# Altium PCB DataPCB.PcbDoc
Units mil, origin at the board's own origin, x right, y up, seen from the top; angles counter-clockwise.
Board outline 1500 x 1687.5 mil, 2 copper layers (Top Layer, Bottom Layer); 60 components, 81 nets, 333 pads, 139 vias.
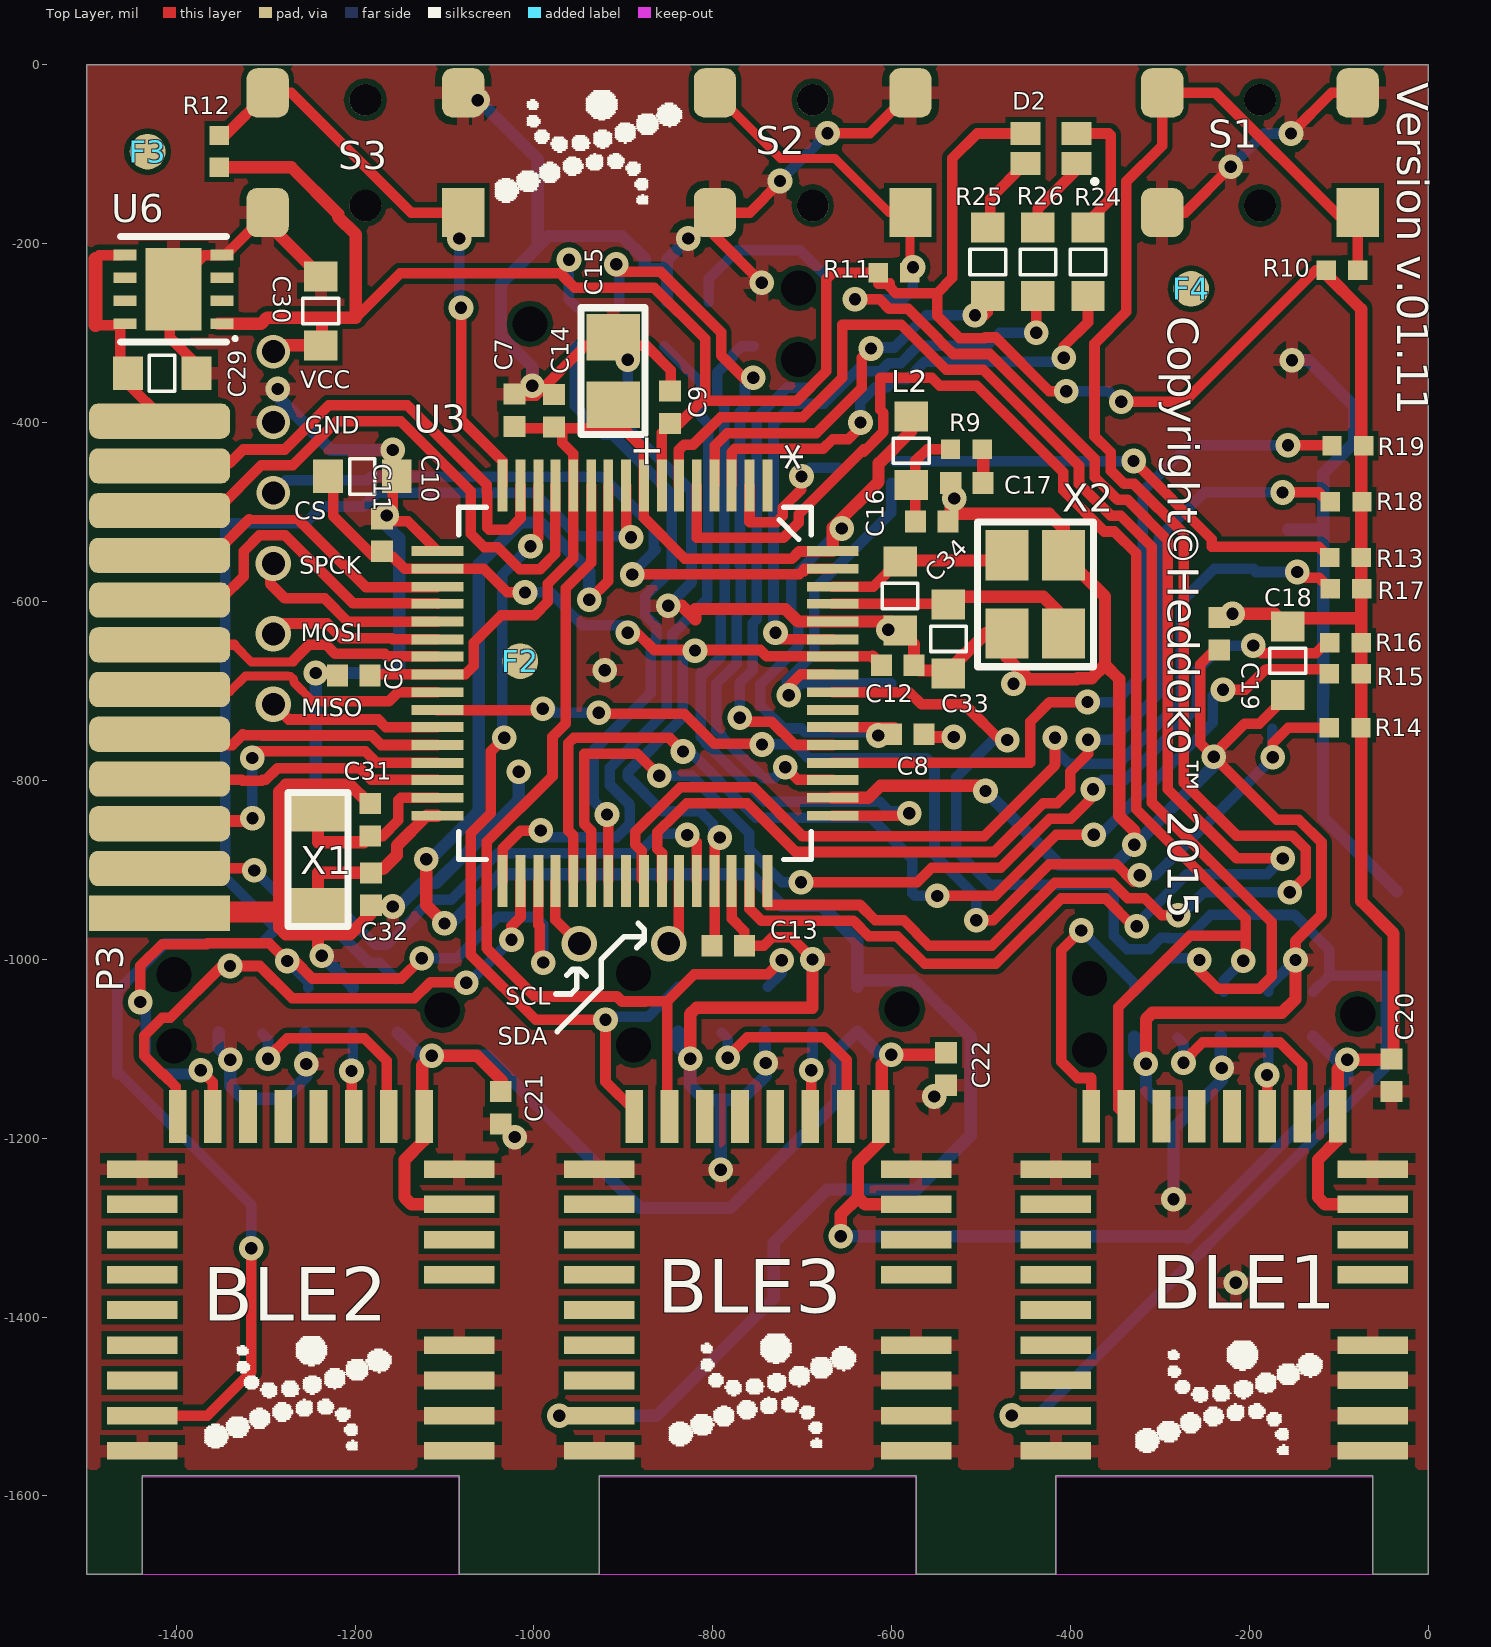
[diagram p0: Top Layer view]
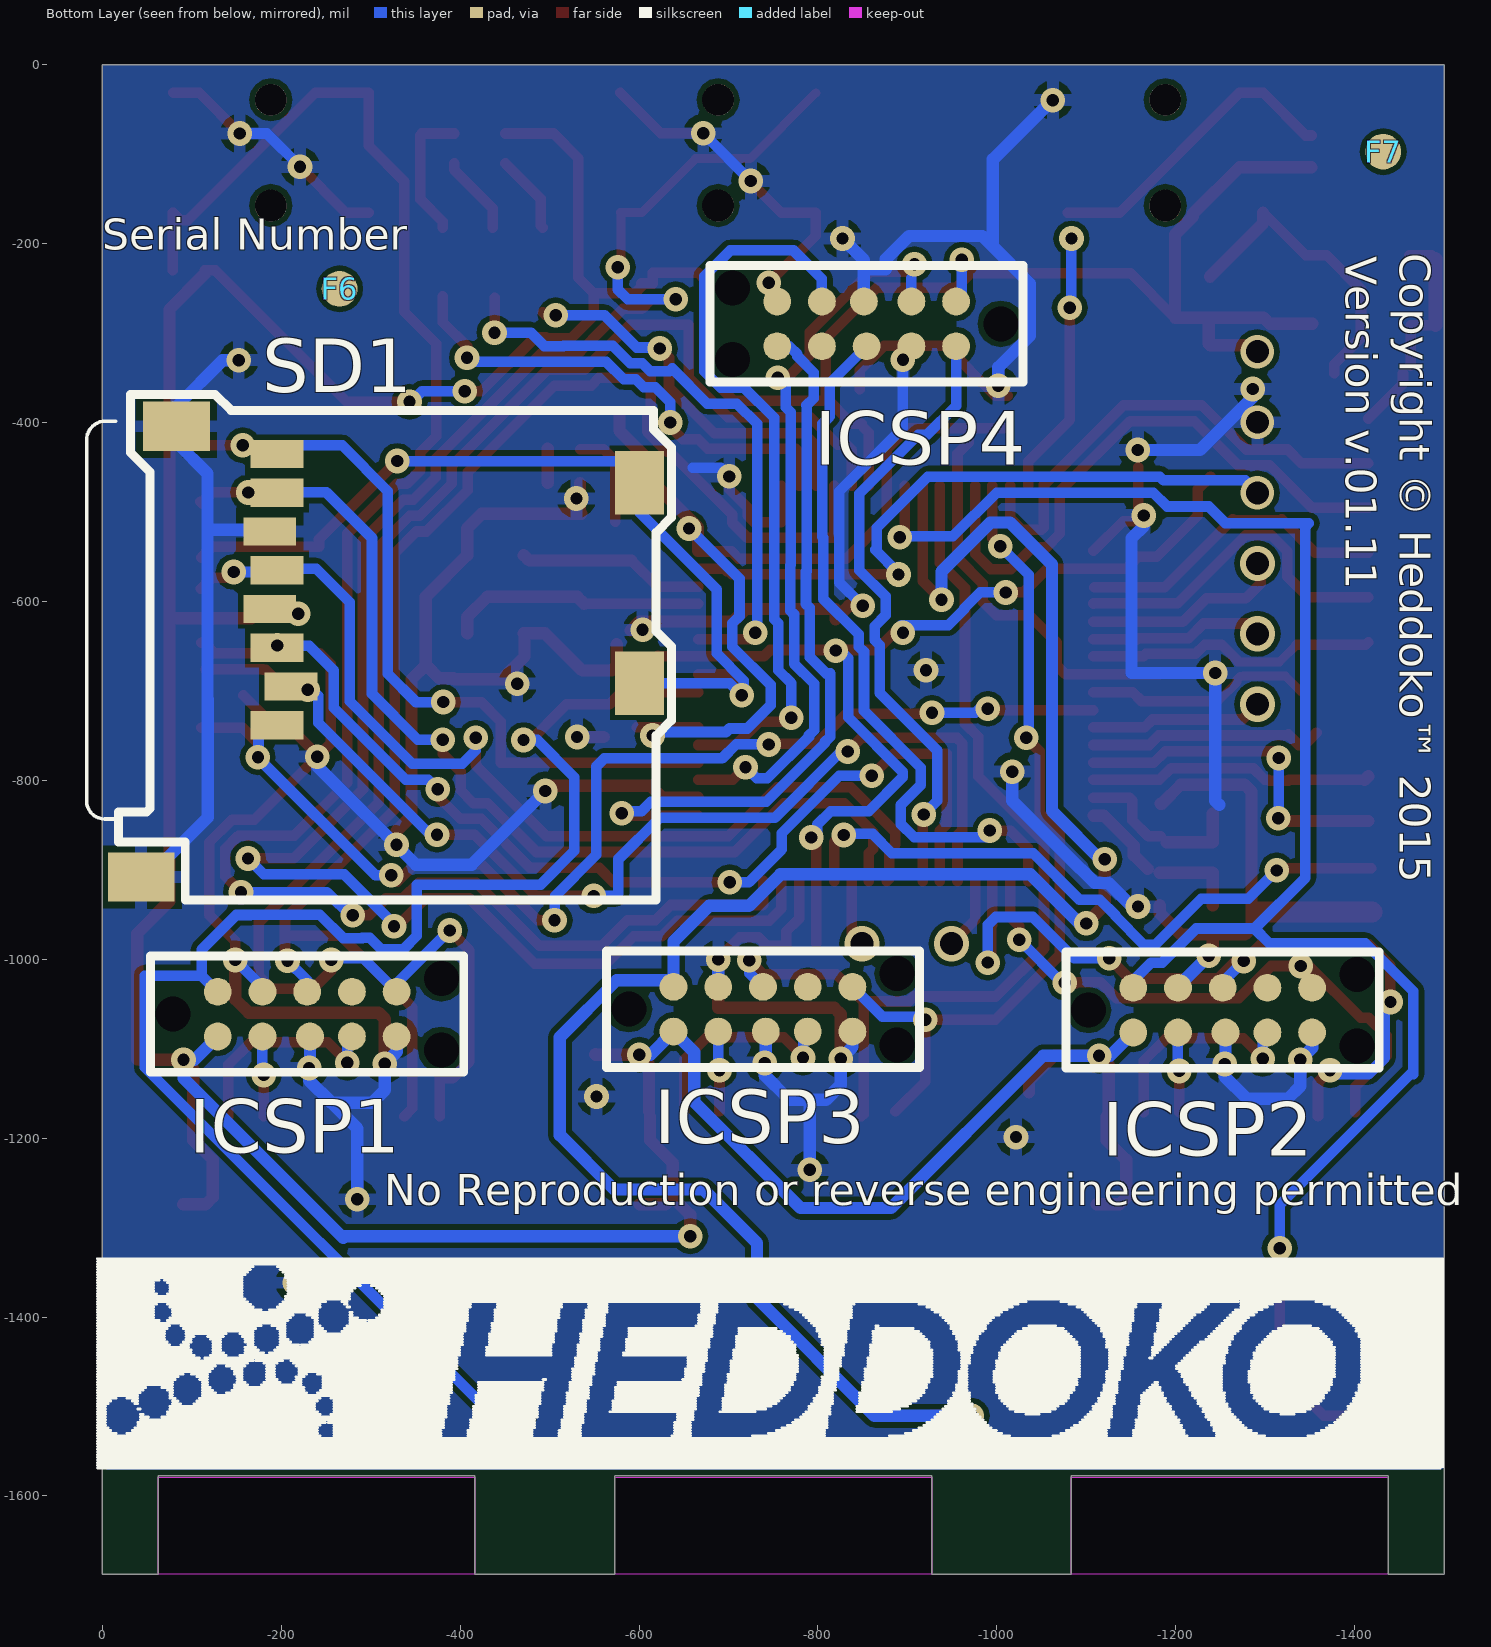
[diagram p1: Bottom Layer view, seen from below]

## Layer stack, top to bottom
Top Solder: solder mask 0.4, Solder Resist, Dk 3.5
Top Layer: signal copper 1.4
Dielectric 1: dielectric 12.6, FR-4, Dk 4.8
Bottom Layer: signal copper 1.4
Bottom Solder: solder mask 0.4, Solder Resist, Dk 3.5

## Board outline
-1437.75,-1687.5 -1437.75,-1577.5 -1083.42,-1577.5 -1083.42,-1687.5 -927.17,-1687.5 -927.17,-1577.5 -572.84,-1577.5 -572.84,-1687.5 -416.58,-1687.5 -416.58,-1577.5 -62.25,-1577.5 -62.25,-1687.5 0,-1687.5 0,0 -1500,0 -1500,-1687.5

## Design rules (kind name [scope] priority, off if disabled: settings)
Clearance [All] p1: gap=5.91
PlaneConnect [All] p1: planeconnectstyle=Relief reliefexpansion=20 reliefentries=4 reliefconductorwidth=13.78 reliefairgap=7.87
PolygonConnect [All] p1: connectstyle=Relief reliefconductorwidth=13.78 reliefentries=4 polygonreliefangle="90 Angle" airgapwidth=7.87
RoutingVias [All] p1: holewidth=15.75 width=31.5 viastyle="Through Hole" minholewidth=11.81 minwidth=23.62 maxholewidth=248.03 maxwidth=393.7
SolderMaskExpansion [All] p1: expansion=4
Width [All] p1: maxlimit=78.74 minlimit=5.91 preferedwidth=13.78
29 further rules are at their usual default settings.

## Components (designator, comment, footprint, x,y, rotation, side; value= is the part's Value field where it differs from the comment)
BLE1 "QS9322" QS9322 -62.2,-1175.64 r180 top locked
BLE2 "QS9322" QS9322 -1083.42,-1175.69 r180 top locked
BLE3 "QS9322" QS9322 -572.84,-1175.69 r180 top locked
C6 "" "CAP 0402" -1201.39,-682.79 r180 top
C7 "" "CAP 0402" -1021.69,-386.4 r90 top
C8 "" "CAP 0402" -582,-748.5 r0 top
C9 "" "CAP 0402" -847.71,-383.08 r90 top
C10 "" 0603 -1191.11,-460.18 r0 top
C11 "" "CAP 0402" -1169.75,-525.8 r90 top
C12 "" "CAP 0402" -593.29,-671.42 r0 top
C13 "" "CAP 0402" -782.81,-984.9 r0 top
C14 "" "CAP 0402" -977.6,-386.93 r90 top
C15 "" 0805 -911.3,-342.66 r90 top
C16 "" "CAP 0402" -555.41,-510.69 r0 top
C17 "" "CAP 0402" -515.94,-467.67 r0 top
C18 "" 0603 -157.21,-667.05 r270 top
C19 "" "CAP 0402" -233.91,-636.25 r270 top
C20 "" "CAP 0402" -41.42,-1129.82 r270 top
C21 "" "CAP 0402" -1037.09,-1166.04 r270 top
C22 "" "CAP 0402" -539.23,-1122.74 r270 top
C29 "" 0603 -1414.98,-344.8 r0 top
C30 "" 0603 -1238.43,-274.67 r90 top
C31 "" "CAP 0402" -1182.93,-844.22 r90 top
C32 "" "CAP 0402" -1182.3,-921.54 r270 top
C33 "4pF" 0603 -536.5,-642.7 r270 top
C34 "4pF" 0603 -590.59,-594.67 r270 top
D2 "LED2_RGB" "LED RGB" -422.05,-93.7 r180 top locked
F2 "" FIDUCIAL_1MM -1015.27,-666.87 r0 top
F3 "" FIDUCIAL_1MM -1431.92,-97.27 r0 top
F4 "" FIDUCIAL_1MM -265.29,-250.56 r0 top
F6 "" FIDUCIAL_1MM -265.29,-250.56 r180 bottom
F7 "" FIDUCIAL_1MM -1431.92,-97.27 r180 bottom
ICSP1 "TC2050" TC2050-IDC-NL -79.03,-1061.4 r180 bottom
ICSP2 "TC2050" TC2050-IDC-NL -1102.48,-1056.93 r180 bottom
ICSP3 "TC2050" TC2050-IDC-NL -588.58,-1055.9 r180 bottom
ICSP4 "TC2050" TC2050-IDC-NL -1004.47,-289.74 r0 bottom
L2 "" 0603 -578.26,-430.89 r90 top
P3 "Ribon Cable pads 12 pads" "Ribbon 12 1.27mm" -1418.39,-948.55 r180 top
R9 "" "RES 0402" -516.61,-429.93 r180 top
R10 "" "RES 0402" -96.67,-229.79 r180 top
R11 "" "RES 0402" -597.5,-232.72 r180 top
R12 "" "RES 0402" -1351.79,-96.88 r270 top
R13 "" "RES 0402" -92.75,-551 r0 top
R14 "" "RES 0402" -93.07,-741.26 r0 top
R15 "" "RES 0402" -93,-680.82 r0 top
R16 "" "RES 0402" -92.75,-646.32 r0 top
R17 "" "RES 0402" -92.26,-586.04 r0 top
R18 "" "RES 0402" -92.01,-488.76 r0 top
R19 "" "RES 0402" -90.05,-426.03 r0 top
R24 "" 0603 -380.72,-219.78 r90 top
R25 "" 0603 -492.65,-219.78 r90 top
R26 "" 0603 -436.69,-219.78 r90 top
S1 "Power" "Tac Sw RA SMT" -187.4,-98.43 r90 top locked
S2 "Action 1" "Tac Sw RA SMT" -687.4,-98.43 r90 top locked
S3 "Action 2" "Tac Sw RA SMT" -1187.4,-98.43 r90 top locked
SD1 "MICRO SD" MICRO_SD_WE -187.23,-608.54 r90 bottom (schematic designator SD1x)
U3 "Flash MCU" QFP50P1200X1200X160-64N -887,-691.56 r270 top locked
U6 "" "DFN8 U-DFN3030-8" -1402.86,-251.19 r90 top
X1 "Xtal 32" "Xtal smd 32khz - larger" -1241.47,-888.67 r270 top
X2 "Xtal 16" "Xtal smd 3.2X2.5" -439.3,-592.43 r90 top

## Footprints (in the part's own frame and the unit in brackets; to place one, negate y for a bottom-side part, rotate by r counter-clockwise, add the part's x,y. Pads: shape width x height; smd on the part's side, far side on the other; paste and mask are expansions set on the pad)
0603 [mm] "SMT  0603"
  rect 0.85x0.95 smd: 1(-0.992,-0.003) 2(0.958,-0.003)
  silkscreen extent -0.38,-0.51 0.34,0.5, body extent -0.89,-0.43 0.86,0.42, height 1
0805 [mil]
  rect 52x60 smd: 1(-37.4,0) 2(38,0)
  silkscreen extent -71,-35 71,36
"CAP 0402" [mm] "Chip Capacitor, 2-Leads, Body 1.00x0.50mm, IPC Medium Density"
  rect 0.6x0.62 smd: 1(-0.46,0) 2(0.46,0)
  body extent -0.53,-0.28 0.53,0.27, height 0.4
"DFN8 U-DFN3030-8" [mm]
  rect 2.35x1.6 smd: 0(0,0)
  rect 0.3x0.65 smd: 1(-0.975,-1.375) 2(-0.325,-1.375) 3(0.325,-1.375) 4(0.975,-1.375) 5(0.975,1.375) 6(0.325,1.375) 7(-0.325,1.375) 8(-0.975,1.375)
  silkscreen extent -1.5,-1.8 1.5,1.5
FIDUCIAL_1MM [mil]
  rrect100% 40x40 smd: 1(0,0)
"LED RGB" [mm] "160-2162-1-ND"
  rect 0.85x0.65 smd: 1(-0.725,0.425) 2(0.725,0.425) 3(-0.725,-0.425) 4(0.725,-0.425)
  silkscreen extent -1.25,0.93 -1.23,0.93, body extent -1.11,-0.75 1.16,0.75, height 1
MICRO_SD_WE [mm] "MICRO SD CARD PUSH-PUSH  from WE  693071010811"
  rect 1.4x1.9 smd: 0(-7.61,3.65) 0(5.19,2.65)
  rect 0.8x1.5 smd: 1(-3.3,-0.2) 2(-2.2,-0.6) 3(-1.1,-0.2) 4(0,0) 5(1.1,-0.2) 6(2.2,0) 7(3.3,-0.2) 8(4.4,-0.2)
  rect 1.8x1.4 smd: CD(-2.11,-10.5) CD(3.59,-10.5)
  silkscreen extent -8.26,-11.4 6.09,5.2, body extent -8.36,-10.87 5.64,4.33, height 1.83
QFP50P1200X1200X160-64N [mil]
  rect 58x11 smd: 1(-221,148) 2(-221,128) 3(-221,108) 4(-221,89) 5(-221,69) 6(-221,49) 7(-221,30) 8(-221,10) 9(-221,-10) 10(-221,-30) 11(-221,-49) 12(-221,-69) 13(-221,-89) 14(-221,-108) 15(-221,-128) 16(-221,-148) 33(221,-148) 34(221,-128) 35(221,-108) 36(221,-89) 37(221,-69) 38(221,-49) 39(221,-30) 40(221,-10) 41(221,10) 42(221,30) 43(221,49) 44(221,69) 45(221,89) 46(221,108) 47(221,128) 48(221,148)
  rect 11x58 smd: 17(-148,-221) 18(-128,-221) 19(-108,-221) 20(-89,-221) 21(-69,-221) 22(-49,-221) 23(-30,-221) 24(-10,-221) 25(10,-221) 26(30,-221) 27(49,-221) 28(69,-221) 29(89,-221) 30(108,-221) 31(128,-221) 32(148,-221) 49(148,221) 50(128,221) 51(108,221) 52(89,221) 53(69,221) 54(49,221) 55(30,221) 56(10,221) 57(-10,221) 58(-30,221) 59(-49,221) 60(-69,221) 61(-89,221) 62(-108,221) 63(-128,221) 64(-148,221)
  silkscreen extent -197,-197 197,197
QS9322 [mm] "QS9322 Bluetooth 4.0 Low Energy Module"
  rect 2x0.5 smd: 1(9,9.5) 2(9,8.5) 3(9,7.5) 4(9,6.5) 5(9,5.5) 6(9,4.5) 7(9,3.5) 8(9,2.5) 9(9,1.5) 18(0,1.5) 19(0,2.5) 20(0,3.5) 21(0,4.5) 22(0,6.5) 23(0,7.5) 24(0,8.5) 25(0,9.5)
  rect 0.5x1.5 smd: 10(8,0) 11(7,0) 12(6,0) 13(5,0) 14(4,0) 15(3,0) 16(2,0) 17(1,0)
  Keep-Out Layer region: 0,10.25 9,10.25 9,13 0,13
  body extent 0,0 9,10.25, height 1
"RES 0402" [mm] "Chip Resistor, 2-Leads, Body 1.00x0.50mm, IPC Medium Density"
  rect 0.55x0.55 smd: 1(-0.45,0) 2(0.45,0)
  body extent -0.53,-0.27 0.53,0.28, height 0.4
"Ribbon 12 1.27mm" [mm] "Pads for 1.27mm pitch ribbon cable"
  rect 4x1 smd: 1(0,0)
  rrect50% 4x1 smd: 2(0,-1.27) 3(0,-2.54) 4(0,-3.81) 5(0,-5.08) 6(0,-6.35) 7(0,-7.62) 8(0,-8.89) 9(0,-10.16) 10(0,-11.43) 11(0,-12.7) 12(0,-13.97)
"Tac Sw RA SMT" [mm] "TE 1571262-2   SWITCH TACTILE SPST-NO 0.05A 12V"
  round 0.9 hole 0.9 unplated paste+0 mask+0: 0(-1.5,0.025) 0(1.5,0.025)
  rect 1.4x1.2 smd: 1(-1.7,-2.75)
  rrect50% 1.4x1.2 smd: 2(-1.7,2.8) 3(1.7,2.8) 4(1.7,-2.75)
  body extent -2.81,-2.67 4.34,2.73, height 1.7
TC2050-IDC-NL [mm] "Tag-Connect 10-Pin with No Legs (PN# TC2050-IDC-NL)"
  round 0.9 hole 0.995 unplated: 0(0,0) 0(7.62,-1.016) 0(7.62,1.016)
  round 0.79 smd paste-0.39: 1(1.27,-0.635) 2(2.54,-0.635) 3(3.89,-0.635) 4(5.08,-0.635) 5(6.35,-0.635) 6(6.35,0.635) 7(5.08,0.635) 8(3.81,0.635) 9(2.54,0.635) 10(1.27,0.635)
  silkscreen extent -0.64,-1.65 8.25,1.65
"Xtal smd 3.2X2.5" [mil]
  rect 56x48 smd: 0(-43.31,32) 0(44,-31.5) 1(-43.31,-31.5) 2(44,32)
  silkscreen extent -81,-65 81,65
"Xtal smd 32khz - larger" [mm] "ST3215SB  3.2×1.5mm"
  rect 1x1.55 smd: 1(-1.3,0) 2(1.3,0)
  silkscreen extent -1.9,-0.85 1.9,0.85

## Part data
BLE1 BLE2 BLE3: "QS9322 Bluetooth 4.0 Low Energy Module"
C6 C7 C8 C9 C10 C11 C12 C13 C14 C16 C18 C19 C20 C21 C22 C29 C30: library part Cap
C15: library part A01-0492
C17: library part A01-0046
C31 C32: library part A01-0013
C33 C34: library part A01-0018
D2: "RGB Led"
F2 F3 F4 F6 F7: library part FIDUCIAL
ICSP1 ICSP2 ICSP3 ICSP4: "ICSP Header"
L2: library part Inductor, "Inductor"
P3: library part "Ribon Cable pads_12", "Pads to solder a ribbon cable to 12pins"
R9: library part A02-0284
R10 R11 R12 R13 R14 R15 R16 R17 R18 R19: library part Res3
R24 R25 R26: library part Res3, "Resistor"
S1 S2 S3: library part "SW PUSHBUTTON", "SWITCH TACT 2.36MM SILV J-LEAD"
SD1: library part "MICRO SD SMK"
U3: library part ATSAM3S4BA-AU
U6: library part "AP7361-33FGE-7 LDO 3.3V", "IC REG LDO 3.3V 1A 8DFN"
X2: library part "Xtal 12"

## Via types
v1: diameter 27.56, hole 13.78, Top Layer to Bottom Layer, 131 vias
v2: diameter 39.37, hole 25.59, Top Layer to Bottom Layer, 5 vias
v3: diameter 37.4, hole 25.59, Top Layer to Bottom Layer, 3 vias

## Nets (pads, with @x,y where several pads share a name; then routed paths per layer and width w, separated by ;. In a path a pad name is that pad's centre, name@x,y a point inside that pad or via, vN(x,y) a via of type N, cw(c..) or ccw(c..) an arc to the next point about the centre after c; other vN are vias at no path point)
"ACTION 1 SW": R11.1 S2.1 S2.3 U3.47 | length 2075.9
  Top Layer w10: S2.3 -724.13,-105.01 -663.23,-105.01 -602.88,-165.35 S2.1 ; R11.1 S2.1@-579.78,-166
  Top Layer w11.81: U3.47 -759,-943.77 -745.62,-957.15 -642.82,-957.15 -625.62,-974.35 -594.12,-974.35 -563.19,-1005.28 -483.61,-1005.28 -410.51,-932.18 -360.91,-932.18 -329.87,-963.21 v1(-326.04,-963.21) ; v1(-641.01,-262.35) -613.56,-262.35 -602.84,-273.07 -581.72,-273.07 -548.19,-306.6 -548.19,-306.97 -540.4,-314.76 -540.04,-314.76 -531.37,-323.42 -490.36,-323.42 -372.96,-440.82 -372.96,-461.06 -347.59,-486.43 -336.45,-486.43 -291.43,-531.45 -291.43,-810.03 -214.09,-887.37 v1(-162.89,-887.37)
  Bottom Layer w11.81: v1(-641.01,-262.35) -587.35,-262.35 -576.32,-251.32 v1(-576.32,-226.43) ; v1(-326.04,-963.21) -326.04,-960.72 -270.25,-904.93 -180.45,-904.93 v1(-162.89,-887.37)
"ACTION 2 SW": R12.1 S3.1 S3.3 U3.16 | length 641.4
  Top Layer w11.81: R12.1 -1345.31,-79.17 S3.3 -1271.21,-31.5 -1137.35,-165.35 S3.1 ; v1(-1081.45,-271.8) -1081.45,-397.16 -1035,-443.62 U3.16
  Bottom Layer w11.81: v1@-1083.4,-269.86 v1(-1083.4,-194.34)
BLE1_CLK: BLE1.8
BLE1_CS: BLE1.7
BLE1_MISO: BLE1.5
BLE1_MOSI: BLE1.6
BLE1_RX: BLE1.10 ICSP1.6 U3.6 | length 1840.6
  Top Layer w11.81: U3.6 -838,-430.79 -832.19,-424.98 -822.21,-424.98 -791.37,-394.14 -699.41,-394.14 -655.35,-350.09 -655.35,-290.74 -610.23,-290.74 -610.17,-290.79 -589.43,-290.79 -539.08,-341.14 -497.7,-341.14 -390.68,-448.16 -390.68,-468.4 -354.93,-504.15 -343.79,-504.15 -309.15,-538.79 -309.15,-824.84 -175.12,-958.87 -175.12,-1019.03 -189.28,-1033.19 -235.48,-1033.19 -256.05,-1012.62 v1(-256.05,-1000.82) ; v1(-388.26,-967.85) -410.43,-990.02 -410.43,-1114.41 -392.03,-1132.8 -377.17,-1132.8 BLE1.10
  Bottom Layer w11.81: v1(-388.26,-967.85) -388.18,-967.85 -329.03,-1027 ICSP1.6 -291.76,-999.13 -257.73,-999.13 v1(-256.05,-1000.82)
BLE1_SCL: BLE1.4
BLE1_SDA: BLE1.3
BLE1_TX: BLE1.11 ICSP1.8 U3.5 | length 1601.5
  Top Layer w11.81: U3.5 -818,-529.09 -721.27,-529.09 -703.98,-511.79 -703.98,-502.73 -631.32,-430.08 -631.32,-432.51 -609.41,-410.6 -609.41,-389.4 -613.04,-385.77 -613.04,-350.19 -555.08,-350.19 -546.42,-358.85 -505.04,-358.85 -408.39,-455.5 -408.39,-475.74 -362.27,-521.86 -351.13,-521.86 -326.86,-546.13 -326.86,-832.18 -204.24,-954.81 -204.24,-971.48 ; BLE1.11 -346.6,-1166.84 -346.6,-1053.66 -266.62,-973.68 -204.24,-973.68 -204.24,-988.14
  Bottom Layer w11.81: ICSP1.8 -229.03,-1023.7 v1(-207.07,-1001.74)
BLE2_CLK: BLE2.8
BLE2_CS: BLE2.7
BLE2_MISO: BLE2.5
BLE2_MOSI: BLE2.6
BLE2_RX: BLE2.10 ICSP2.6 U3.34 | length 657.3
  Top Layer w11.81: BLE2.10@-1400.62,-1171.17 -1400.62,-1142.39 -1414.68,-1128.33 -1415.49,-1128.33 -1435.71,-1108.1 -1435.71,-1085.76 -1415.49,-1065.53 -1406.68,-1065.53 -1348.72,-1007.58 v1(-1339.74,-1007.58) -1306.56,-1007.58 -1270.32,-1043.82 -1133.77,-1043.82 -1115.49,-1025.53 -1089.47,-1025.53 -1087.38,-1027.63 -1077.21,-1027.63 v1(-1075.76,-1026.18) ; v1(-1025.05,-978.43) -1025.05,-963.11 -1015,-953.07 U3.34
  Bottom Layer w11.81: v1(-1075.76,-1026.18) -1072.8,-1026.18 v1(-1025.05,-978.43)
BLE2_SCL: BLE2.4
BLE2_SDA: BLE2.3
BLE2_TX: BLE2.11 ICSP2.8 U3.35 | length 915.8
  Top Layer w11.81: v1(-1440.01,-1047.9) -1440.01,-1007.54 -1415.56,-983.08 -1365.97,-983.08 -1364.88,-981.99 -1295.96,-981.99 v1(-1275.91,-1002.04) -1267.17,-1002.04 -1247.64,-1021.56 -1148.22,-1021.56 v1(-1125.56,-998.9) ; v1(-1372.52,-1123.99) -1359.01,-1137.51 BLE2.11 ; U3.35 -995,-961.43 -993.72,-962.72 v1@-993.72,-1003.78
  Bottom Layer w11.81: v1(-1440.01,-1047.9) -1433.88,-1054.03 -1433.88,-1109.94 -1415.49,-1128.33 -1376.86,-1128.33 v1(-1372.52,-1123.99) ; v1(-1275.91,-1002.04) -1252.48,-1025.47 ICSP2.8 ; v1(-1125.56,-998.9) -1086.3,-998.9 -1040.24,-952.84 -998.6,-952.84 -989.73,-961.71 v1(-989.73,-1003.78)
BLE3_CLK: BLE3.8
BLE3_CS: BLE3.7
BLE3_MISO: BLE3.5
BLE3_MOSI: BLE3.6
BLE3_RX: BLE3.10 ICSP3.6 U3.14 | length 951.4
  Top Layer w11.81: v1(-1033.02,-752.6) -1048.17,-767.75 -1048.17,-836.85 -1070.44,-859.12 -1070.44,-995.32 -998.16,-1067.6 v1(-919.97,-1067.6) -919.97,-1136.88 BLE3.10@-886.72,-1170.14 ; v1(-1003.79,-538.4) -995,-529.61 U3.14
  Bottom Layer w11.81: v1(-1033.02,-752.6) -1035.59,-750.03 -1035.59,-570.2 v1(-1003.79,-538.4) ; v1(-919.97,-1067.6) -916.88,-1064.5 -872.18,-1064.5 ICSP3.6
BLE3_SCL: BLE3.4
BLE3_SDA: BLE3.3
BLE3_TX: BLE3.11 ICSP3.8 U3.11 | length 1104.9
  Top Layer w11.81: U3.11 -936,-556.91 -964.41,-585.32 -964.41,-736.52 -979.26,-751.37 -979.26,-795.45 -1052.72,-868.91 -1052.72,-987.98 -998.97,-1041.73 -907.15,-1041.73 -901.58,-1047.3 -875.57,-1047.3 -875.29,-1047.01 -851,-1047.01 ; BLE3.11 -851,-1173.11 -851,-1047.01 ; v1(-723.11,-1001.19) -738.6,-1016.67 -820.66,-1016.67 -851,-1047.01
  Bottom Layer w11.81: ICSP3.8 -723.11,-1015.43 v1(-723.11,-1001.19)
BLE_RST1: BLE1.2 ICSP1.10 U3.56 | length 1705.2
  Top Layer w11.81: U3.56 -580.24,-701.56 -566.58,-715.23 -518.73,-715.23 -474.95,-759.01 v1(-470.91,-754.97) ; v1(-465.96,-1510.09) v1@-465.76,-1510.29
  Bottom Layer w11.81: v1(-470.91,-754.97) -486.33,-754.97 -527.75,-796.39 -527.75,-878.95 -489.9,-916.8 -351.7,-916.8 -351.63,-916.87 -351.63,-973.81 -336.64,-988.8 -311.81,-988.8 -299.16,-976.15 -290.72,-976.15 -290.51,-976.37 -269.31,-976.37 -243.18,-950.24 -165.95,-950.24 -165.6,-950.59 -149.81,-950.59 -110.93,-989.47 -110.93,-1018.3 ; v1(-465.96,-1510.09) -437.02,-1510.09 -47.63,-1120.7 -47.63,-1018.3 -110.93,-1018.3 ; ICSP1.10 -110.93,-1018.3
BLE_RST2: BLE2.2 ICSP2.10 U3.9 | length 2025.7
  Top Layer w11.81: BLE2.2 -1365.32,-1510.34 -1316.12,-1461.13 v1(-1316.12,-1323.15) ; U3.9 -897,-522.76 v1(-891.41,-528.35)
  Bottom Layer w11.81: v1(-1316.12,-1323.15) -1316.12,-1274.59 -1462.29,-1128.41 -1465.6,-1128.41 -1465.6,-1035.65 -1411.94,-981.99 -1304.44,-981.99 -1288.1,-965.65 ; ICSP2.10@-1154.34,-1022.16 -1172.75,-1003.75 -1184.88,-1003.75 -1222.98,-965.65 -1288.1,-965.65 ; v1(-891.41,-528.35) -892.38,-527.37 -950.78,-527.37 -999.76,-478.4 -1174.98,-478.4 -1190.53,-493.95 -1237.02,-493.95 -1255.58,-512.51 -1348.87,-512.51 -1345,-516.38 -1345,-908.75 -1288.1,-965.65
BLE_RST3: BLE3.2 ICSP3.10 U3.10 | length 2278.4
  Top Layer w11.81: v1(-938.07,-598.31) -917,-577.23 U3.10
  Top Layer w13.78: v1(-1120.54,-888.19) -1120.54,-939.46 v1(-1100,-960) ; v1(-971.82,-1510.49) -971.66,-1510.34 BLE3.2
  Bottom Layer w13.78: v1(-1120.54,-888.19) -1120.54,-893.25 -1061.63,-834.35 -1061.63,-558.66 -1014.8,-511.82 -992.78,-511.82 -938.07,-566.53 v1(-938.07,-598.31) ; v1(-1100,-960) -1092.49,-960 -1037.68,-905.18 -757.99,-905.18 -722.76,-940.42 -690.46,-940.42 -678.21,-940.41 -638.58,-980.04 ICSP3.10@-638.58,-1023.52 ; v1(-971.82,-1510.49) -863.25,-1510.49 -731.84,-1379.08 -731.84,-1317.29 -672.07,-1257.52 -572.33,-1257.52 -511.51,-1196.7 -511.51,-1087.17 -575.16,-1023.52 ICSP3.10@-638.58,-1023.52 ; ICSP3.10 ICSP3.10@-638.58,-1023.52
BLUELED: R24.1 U3.3 | length 555.6
  Top Layer w11.81: U3.3 -779,-433.29 -775.28,-429.57 -676.86,-429.57 -666.03,-418.75 -648.75,-418.75 -630,-400 v1(-635,-400) ; v1(-407.68,-327.55) -407.68,-314.93 -380.59,-287.84 R24.1
  Bottom Layer w11.81: v1(-635,-400) -635,-377.31 -618.3,-360.61 -605.27,-360.61 -596.25,-351.59 -582.73,-351.59 -563.48,-332.34 -412.48,-332.34 v1(-407.68,-327.55)
CS_SPI: U3.63 | length 739.9
  Top Layer w11.81: v1(-890,-570) v1@-887.38,-570 ; v1@-878.68,-569.84 -703.48,-569.84 -699.89,-566.25 -697.93,-566.25 -697.93,-563.56 U3.63
  Bottom Layer w11.81: v3(-1291.31,-478.62) -1277.51,-464.82 -1186.46,-464.82 -1182.32,-460.68 -922.89,-460.68 -865.82,-517.75 -865.82,-540.54 -863.89,-542.47 -890,-568.58 v1(-890,-570)
GND: BLE1.1 BLE1.9 BLE1.18 BLE1.22 BLE1.23 BLE1.24 BLE1.25 BLE2.1 BLE2.9 BLE2.18 BLE2.22 BLE2.23 BLE2.24 BLE2.25 BLE3.1 BLE3.9 BLE3.18 BLE3.22 BLE3.23 BLE3.24 BLE3.25 C6.2 C7.2 C8.2 C9.2 C10.2 C11.2 C12.2 C13.2 C14.2 C15.2 C16.2 C17.1 C18.2 C19.2 C20.2 C21.2 C22.2 C29.2 C30.2 C31.2 C32.2 C33.2 C34.2 ICSP1.3 ICSP1.5 ICSP1.9 ICSP2.3 ICSP2.5 ICSP2.9 ICSP3.3 ICSP3.5 ICSP3.9 ICSP4.3 ICSP4.5 ICSP4.9 P3.1 S1.2 S1.4 S2.2 S2.4 S3.2 S3.4 SD1.0 SD1.6 U3.2 U3.17 U3.46 U3.50 U3.60 U6.0 U6.4 X2.0 | length 8458.6
  Top Layer w11.81: C29.2 -1377.26,-334.78 -1407.08,-304.97 -1407.08,-251.34 -1368.69,-212.96 -1345.24,-212.96 S3.2 ; C10.2@-1157.93,-450 -1157.93,-510.44 -1141.13,-510.44 U3.17 ; C7.2@-1012.17,-369.99 -998.2,-369.99 -942.65,-314.43 -874.1,-314.43 -846.87,-341.67 C9.2@-846.87,-362.72 ; U3.46 -779,-954.55 -764.7,-968.85 C13.2 -743.02,-984.9 -733.71,-975.6 -712.51,-975.6 -688.58,-999.53 v1(-688.58,-1000.33) ; U3.2 -759,-511.09 -758.72,-511.37 -728.61,-511.37 -721.69,-504.46 -721.69,-495.39 -700.92,-474.62 v1(-700.92,-460.3) ; v1(-745.16,-243.93) -797.64,-191.46 S2.2 -758.95,-165.35 -725,-131.4 v1(-725,-130) ; v1(-671.75,-76.75) -624.38,-76.75 S2.4 ; S1.2 -272.14,-165.35 v1(-221.06,-114.28) ; C19.2@-242.83,-657.98 -255.27,-670.43 -255.27,-758.49 v1@-241.36,-772.4 ; C18.2 -189.21,-736.64 -205.6,-736.64 v1@-241.36,-772.4 ; v1(-153.65,-76.97) -108.18,-31.5 S1.4 ; v1(-148.67,-1000.88) -148.67,-979.68 -119.59,-950.59 -119.59,-869.43 -144.96,-844.06 -169.7,-844.06 v1(-240.14,-773.62) v1@-241.36,-772.4
  Top Layer w13.78: S3.2 -1297.64,-177.61 C30.2 ; v1@-1241.47,-991.55 -1241.47,-972.34 ; C31.2 -1184.56,-826.11 -1205.65,-805.01 -1277.28,-805.01 -1284.77,-812.51 -1284.77,-964.84 -1277.28,-972.34 -1241.47,-972.34 ; C32.2 -1182.3,-948.98 -1205.65,-972.34 -1241.47,-972.34 ; v1(-850,-605) -834.4,-605 -819.58,-619.82 -819.58,-608.43 -718.99,-608.43 -704.85,-622.56 U3.60 -600.54,-622.56 C34.2 ; v1(-825.41,-1111.27) -825.41,-1061.46 -818.2,-1054.25 -688.58,-1054.25 ; -688.58,-1053.78 v1(-688.58,-1000.33) ; U3.50 -626.14,-819.56 -612.62,-806.04 v1@-495.23,-806.04 ; C34.2@-575.18,-647.92 C12.2 C12.2@-569.36,-677.24 ; C8.2@-560.71,-751.68 v1(-530.75,-751.68) ; C33.2@-537.3,-677.24 C12.2@-569.36,-677.24 ; C16.2@-535.42,-502.14 -424.02,-502.14 -407.81,-518.35 -407.81,-548.43 -361.69,-594.55 -361.69,-671.14 ; C16.2@-534.05,-500.77 C17.1 ; v1(-328.8,-871.97) -328.8,-856.68 -345.71,-839.78 -345.71,-782.81 -345.56,-782.66 -345.56,-758.39 -345.71,-758.25 -345.71,-687.12 -361.69,-671.14 ; v1(-315.86,-1116.77) -315.86,-1066.96 -308.65,-1059.75 -163.66,-1059.75 -148.67,-1044.76 v1(-148.67,-1000.88) ; C12.2@-569.36,-677.24 -536.45,-677.24 -494.94,-635.74 -471.3,-635.74 -472.04,-636.48 -472.04,-661.83 -446.98,-686.9 -393.19,-686.9 -392.25,-685.96 -376.51,-685.96 -361.69,-671.14
  Top Layer w23.62: P3.1@-1419.57,-947.08 -1290.8,-947.08
  Bottom Layer w11.81: v1(-895,-330) -895,-405.89 -823.87,-477.02 -823.87,-578.87 v1(-850,-605) ; v1(-725,-130) v1(-671.75,-76.75) ; v1(-700.92,-460.3) -691.41,-450.79 -660.04,-450.79 ; v1(-221.06,-114.28) -183.75,-76.97 v1(-153.65,-76.97) ; ICSP1.9 -179.03,-1031.24 v1(-148.67,-1000.88)
  Bottom Layer w13.78: ICSP2.5 -1352.48,-1099.14 v1(-1339.31,-1112.3) -1339.31,-1141.77 -1325.15,-1155.93 -1279.53,-1155.93 ; v1(-1286.25,-362.56) -1286.25,-371.61 -1227.13,-430.73 v1(-1157.66,-430.73) ; -1281.84,-1158.24 -1279.53,-1155.93 ; ICSP2.3 -1255.63,-1116.09 v1(-1254.6,-1117.12) -1254.6,-1131 -1279.53,-1155.93 ; -1248.63,-827.45 -1243.99,-822.81 v1(-1243.99,-680.08) -1150.51,-680.08 -1150.51,-529.47 -1164.38,-515.6 v1(-1164.38,-503.99) ; v1(-1237.04,-995.97) -1202.48,-1030.53 ICSP2.9 ; v1(-1157.8,-941.04) -1151.25,-941.04 -1124.97,-914.77 -1109.53,-914.77 -1093.96,-899.2 -1093.49,-899.2 -1017.08,-822.78 v1(-1017.08,-790.44) ; v1(-1062.65,-39.66) -1062.65,-38.81 -995.56,-105.9 -995.56,-203.34 ; v1(-1001.74,-359.04) -1001.74,-338.26 -1036.85,-303.16 -1036.85,-244.63 -995.56,-203.34 ; -853.53,-228.72 -875.98,-228.72 -875.98,-217.34 -901.8,-191.51 -983.74,-191.51 -995.56,-203.34 ; ICSP4.3 -851.32,-218.3 v1(-827.42,-194.39) ; ICSP3.5 -838.58,-1098.1 v1(-825.41,-1111.27) -825.41,-1140.73 -808.94,-1157.21 -791.01,-1157.21 ; v1(-791.01,-1235.52) -791.01,-1157.21 ; -767.94,-1157.21 -791.01,-1157.21 ; -765.63,-1154.9 -740.7,-1129.97 v1(-740.7,-1116.08) -741.73,-1115.06 ICSP3.3 ; ICSP3.9 v1(-688.58,-1000.33) ; v1(-495.23,-812.03) -412.97,-894.29 -350.34,-894.29 -240.14,-784.09 v1(-240.14,-773.62) ; ICSP1.5 -329.03,-1103.6 v1(-315.86,-1116.77) -315.86,-1146.23 -301.7,-1160.4 -256.08,-1160.4 ; v1(-285.09,-1268.33) -285.09,-1189.41 -256.08,-1160.4 ; ICSP1.3 -232.18,-1120.56 v1(-231.15,-1121.59) -231.15,-1135.47 -256.08,-1160.4 ; -157.09,-520.08 -117.64,-520.08 ; v1(-152.57,-330.25) -134.81,-330.25 -83.27,-381.79 -83.27,-422.71 -117.64,-457.09 -117.64,-520.08 ; SD1.0@-35.38,-923.97 -117.82,-841.53 -117.82,-709.06 -117.64,-708.87 -117.64,-520.08
  other v1: -215.46,-1361.71 -1021.34,-1198.86 -552.49,-1153.57 -463.89,-691.92 -920.88,-676.86 -603.97,-631.71 -530,-485
  other v3: -1291.28,-399.72
GREENLED: R25.1 U3.4 | length 431.7
  Top Layer w11.81: U3.4 -798,-425.83 -784.03,-411.86 -684.19,-411.86 -633.52,-361.19 -633.52,-327.62 v1(-623.21,-317.3) ; v1(-506.95,-280.11) -495.97,-280.11 -492.52,-276.67
  Bottom Layer w11.81: v1(-623.21,-317.3) -622.07,-316.16 -597.41,-316.16 -561.36,-280.11 v1(-506.95,-280.11)
I2C1: U3.36 | length 81.1
  Top Layer w11.81: U3.36 -976,-955.87 v2(-949.25,-982.62)
I2C2: U3.43 | length 74.7
  Top Layer w11.81: v2(-849.25,-982.62) -838,-971.38 U3.43
"JACK DETECT 1": P3.7 U3.23 | length 329.4
  Top Layer w9.84: -1335.17,-648.43 -1315.84,-667.76 -1270.03,-667.76 ; -1270.03,-666.77 -1268.83,-667.97
  Top Layer w11.81: P3.7@-1415.09,-645.56 -1412.23,-648.43 -1335.17,-648.43 ; -1268.83,-665.74 -1251.51,-648.43 -1232.31,-648.43 -1221.97,-658.77 -1166.57,-658.77 -1163.78,-661.56 U3.23
"JACK DETECT 2": P3.6 U3.25 | length 256.8
  Top Layer w9.84: P3.6@-1339.9,-700.68 -1322.73,-683.5 -1275.56,-683.5 -1275.35,-683.72 -1272.12,-683.72 -1268.59,-687.25 -1268.59,-690.27 -1247,-711.87 -1243.97,-711.87
  Top Layer w11.81: -1243.97,-711.87 -1162.22,-711.87 -1151.92,-701.56 U3.25
"JACK EN1": P3.10 U3.13 | length 659
  Top Layer w11.81: P3.10@-1415.09,-495.56 -1352.5,-495.56 -1304.88,-447.95 -1271.31,-447.95 -1271.02,-447.66 -1269.65,-447.66 -1220.5,-398.52 -1148.92,-398.52 -1070.44,-477 -1070.44,-524.52 -1055.55,-539.4 -1040.32,-539.4 -1015.74,-563.99 -993.19,-563.99 -976,-546.8 U3.13
"JACK EN2": P3.11 U3.15 | length 554.4
  Top Layer w11.81: P3.11@-1415.09,-445.56 -1340.39,-445.56 -1325.06,-430.23 -1278.64,-430.23 -1229.21,-380.8 -1141.58,-380.8 -1052.72,-469.66 -1052.72,-477.9 -1052.31,-478.31 -1052.31,-517.58 -1049.88,-520.02 -1027.77,-520.02 -1015,-507.25 U3.15
"JACK OC1": P3.9 U3.19 | length 353.2
  Top Layer w9.84: -1318.48,-508.31 -1263.75,-508.31
  Top Layer w11.81: P3.9@-1415.09,-545.56 -1355.73,-545.56 -1318.48,-508.31 ; -1263.75,-508.31 -1187.73,-584.34 U3.19@-1108.77,-584.34
"JACK OC2": P3.8 U3.20 | length 384.5
  Top Layer w11.81: P3.8@-1415.09,-595.56 -1347.96,-595.56 -1324.54,-572.15 -1324.54,-543.79 -1306.77,-526.02 -1278.29,-526.02 -1202.26,-602.05 -1108,-602.05 U3.20
LBO: P3.5 U3.28 | length 264.8
  Top Layer w11.81: P3.5@-1357.37,-746.81 -1343.61,-760.56 -1337.46,-760.56 -1325.72,-748.82 -1325.13,-749.41 -1304.4,-749.41 -1303.92,-749.89 -1181.19,-749.89 -1170.52,-760.56 U3.28
MISO: U3.27 | length 193.9
  Top Layer w11.81: v2(-1291.34,-715) -1274.3,-732.04 -1173.99,-732.04 -1165.47,-740.56 U3.27
MOSI: U3.22 | length 205.7
  Top Layer w11.81: v2@-1299.74,-640.58 -1283.87,-624.71 -1230.98,-624.71 -1214.63,-641.05 -1159.24,-641.05 -1157.73,-642.56 U3.22
  other v2: -1291.34,-636.26
NetBLE1_15: BLE1.15 ICSP1.2 | length 89.9
  Top Layer w11.81: v1(-180.44,-1129.52) -180.44,-1175.52 BLE1.15
  Bottom Layer w11.81: v1(-180.44,-1129.52) -179.03,-1128.11 ICSP1.2
NetBLE1_16: BLE1.16 ICSP1.4 | length 242.2
  Top Layer w11.81: v1(-273.82,-1115.82) -273.82,-1114.35 -252.16,-1092.69 -166.21,-1092.69 -140.94,-1117.95 BLE1.16
  Bottom Layer w11.81: ICSP1.4@-280.43,-1087.81 -273.82,-1094.42 v1(-273.82,-1115.82)
NetBLE2_15: BLE2.15 ICSP2.2 | length 89.9
  Top Layer w11.81: v1(-1203.89,-1125.05) -1203.89,-1171.05 BLE2.15@-1203.77,-1171.17
  Bottom Layer w11.81: v1(-1203.89,-1125.05) -1202.48,-1123.64 ICSP2.2
NetBLE2_16: BLE2.16 ICSP2.4 | length 242.2
  Top Layer w11.81: v1(-1297.27,-1111.35) -1297.27,-1109.88 -1275.61,-1088.22 -1189.66,-1088.22 -1164.4,-1113.48 BLE2.16@-1164.4,-1171.17
  Bottom Layer w11.81: ICSP2.4@-1303.89,-1083.34 -1297.27,-1089.95 v1(-1297.27,-1111.35)
NetBLE3_15: BLE3.15 ICSP3.2 | length 89.9
  Top Layer w11.81: v1(-689.99,-1124.02) -689.99,-1170.02 BLE3.15@-689.86,-1170.14
  Bottom Layer w11.81: v1(-689.99,-1124.02) -688.58,-1122.61 ICSP3.2
NetBLE3_16: BLE3.16 ICSP3.4 | length 242.2
  Top Layer w11.81: v1(-783.37,-1110.32) -783.37,-1108.85 -761.71,-1087.19 -675.76,-1087.19 -650.49,-1112.45 BLE3.16@-650.49,-1170.14
  Bottom Layer w11.81: ICSP3.4@-789.98,-1082.31 -783.37,-1088.92 v1(-783.37,-1110.32)
NetC6_1: C6.1 C7.1 C8.1 C14.1 C15.1 L2.2 U3.8 U3.12 U3.24 U3.54 U3.64 | length 1558.4
  Top Layer w11.81: C6.1@-1182.06,-681.56 U3.24 -1076.8,-681.56 -1067.19,-671.96 -1067.19,-646.42 -1036.36,-615.59 -999.4,-615.59 -984.41,-600.6 -984.41,-580.26 -956,-551.86 U3.12 -956,-434.98 -968.31,-422.67 C14.1@-968.31,-406.21 ; C7.1@-1012.17,-406.21 C14.1@-968.31,-406.21 ; C14.1@-969.13,-405.39 C14.1@-968.31,-406.21 ; U3.54 C8.1@-597.44,-740.56 ; U3.64 -666.65,-544.21 -703.64,-544.21 -711.55,-552.12 -831.44,-552.12 -877,-506.57 U3.8 -877,-429.59 -900.39,-406.21 C14.1@-968.31,-406.21
  Top Layer w13.78: U3.64 -666,-517.48 -614.9,-466.38 -614.9,-445.74 -614.35,-445.74 -578.13,-409.51 L2.2
  Bottom Layer w11.81: v1(-655.92,-518.44) -712.28,-574.8 -712.28,-616.53 -704.41,-624.4 -704.41,-650.76 -747.02,-693.38 -747.02,-715.97 -720.88,-742.11 -701.15,-742.11 -697.24,-746.02 -617.26,-746.02 -615,-748.28 v1(-615,-750)
NetC10_1: C10.1 C11.1 C12.1 C13.1 U3.18 U3.45 U3.58 | length 1170.6
  Top Layer w11.81: C10.1@-1238.86,-460.48 -1224.59,-474.75 -1224.59,-504.16 -1178.74,-550.01 -1158.12,-550.01 -1144.56,-563.56 U3.18 -1056.17,-563.56 -1029.74,-590 v1(-1010,-590) ; v1(-895,-635) -885,-635 -865.66,-654.34 -746.85,-654.34 -739.63,-661.56 U3.58 C12.1@-621.25,-661.56 ; C13.1@-798,-981.99 U3.45 -798,-869.47 v1(-792.41,-863.88)
  Top Layer w13.78: C12.1@-621.25,-661.56 C12.1
  Bottom Layer w11.81: v1(-1010,-590) -981.54,-590 -963.66,-607.88 -963.66,-608.91 -945.68,-626.89 -893.11,-626.89 -895,-628.78 v1(-895,-635) ; v1(-820,-655) -825,-655 -833.77,-663.77 -833.77,-729.62 -894.85,-790.7 -894.85,-796.34 -856.78,-834.41 -814.4,-834.41 -799.41,-849.4 -799.41,-856.88 v1(-792.41,-863.88)
NetC16_1: C16.1 L2.1 R9.2 | length 112.2
  Top Layer w11.81: C16.1 -573.52,-443.09 -560.36,-429.93 R9.2
NetC17_2: C17.2 R9.1 | length 38.2
  Top Layer w13.78: C17.2 R9.1@-497.83,-429.46
NetD2_1: D2.1 R26.2 | length 89.5
  Top Layer w11.81: R26.2 -436.55,-160.76 -393.5,-117.71 D2.1
NetD2_2: D2.2 R25.2 | length 89
  Top Layer w11.81: R25.2 -489.91,-179.45 -489.91,-149.75 D2.2
NetD2_3: D2.3 R24.2 | length 152.6
  Top Layer w11.81: D2.3 -357.23,-76.97 -355.39,-78.81 -355.39,-150.23 -380.59,-175.43 R24.2
NetICSP4_2: ICSP4.2 U3.51 | length 829.5
  Top Layer w11.81: v1(-907.92,-222.98) -907.92,-231.34 -907.64,-231.62 -858.47,-231.62 -790.84,-299.25 -790.84,-324.97 -764.01,-351.8 -762.22,-350 v1(-755,-350) ; v1(-719.09,-785.42) -704.95,-799.56 U3.51
  Bottom Layer w11.81: ICSP4.2 -904.47,-238.62 ; v1(-755,-350) -755.32,-350 -763.69,-358.37 -764.01,-358.05 -764.01,-382.77 -769.63,-388.38 -769.63,-559.07 -768.98,-559.72 -768.98,-610.28 -773.31,-614.61 -773.31,-669.55 -795.99,-692.23 -795.99,-743.87 -790,-749.85 -790,-751.19 -743.28,-797.91 -731.58,-797.91 v1(-719.09,-785.42)
NetICSP4_4: ICSP4.4 U3.53 | length 845.3
  Top Layer w11.81: v1@-770,-734.41 -734.4,-734.41 -708.98,-759.83 -708.49,-759.83 -707.76,-760.56 U3.53
  Bottom Layer w11.81: ICSP4.4 -804.47,-239.48 -772.67,-207.68 -702.13,-207.68 -673.07,-236.74 -673.07,-342.75 -691.46,-361.14 -717.33,-361.14 -751.01,-394.82 -751.01,-619.82 -755.59,-624.4 -755.59,-676.89 -770,-691.3 v1(-770,-730)
NetICSP4_6: ICSP4.6 U3.49 | length 836
  Top Layer w11.81: U3.49 -583.32,-839.56 v1(-580.59,-836.83)
  Bottom Layer w11.81: ICSP4.6 -768.08,-314.74 -777.1,-323.77 -777.1,-326.08 -795.31,-344.28 -795.31,-372.71 -787.16,-380.86 -787.35,-381.04 -787.35,-566.41 -786.69,-567.06 -786.69,-602.94 -791.02,-607.27 -791.02,-662.21 -809.4,-680.59 -813.7,-680.59 -813.7,-751.2 -807.72,-757.19 -807.72,-758.53 -742.17,-824.07 -613.22,-824.07 -602.76,-834.53 -580.59,-834.53 v1(-580.59,-836.83)
NetICSP4_8: ICSP4.8 U3.33 | length 802.6
  Top Layer w11.81: U3.33 -1035,-876.25 -1014.93,-856.17 v1(-992.22,-856.17)
  Bottom Layer w11.81: v1@-992.22,-863.82 -907.64,-863.82 -892.65,-848.83 -892.65,-827.63 -915.02,-805.26 -915.02,-785.8 -851.49,-722.28 -851.49,-656.44 -845.59,-650.54 -845.59,-636.78 -806.15,-597.34 -806.15,-528.78 -805.06,-527.69 -805.06,-401.23 -813.03,-393.27 -813.03,-356.18 ICSP4.8
NetICSP4_10: ICSP4.10 U3.39 | length 701.5
  Top Layer w11.81: v1(-918.24,-838.23) -917,-839.47 U3.39
  Bottom Layer w11.81: ICSP4.10 -954.47,-381.2 -921.94,-413.73 -912.22,-413.73 -846.18,-479.77 -846.18,-564.99 -875.59,-594.4 -875.59,-615.6 -863.31,-627.88 -863.31,-643.2 -869.21,-649.1 -869.21,-702.44 -933.45,-766.68 -933.45,-823.02 v1(-918.24,-838.23)
"POWER SW": R10.1 S1.1 S1.3 U3.48 | length 2107.1
  Top Layer w11.81: U3.48 -739,-938.7 -738.26,-939.44 -635.48,-939.44 -618.28,-956.63 -586.78,-956.63 -558.47,-984.94 -488.33,-984.94 -417.84,-914.46 -353.57,-914.46 -336.11,-931.92 -317.13,-931.92 -298.27,-950.78 v1(-279.91,-950.78) ; v1(-155,-925) -137.3,-907.3 -137.3,-876.77 -152.29,-861.78 -214.63,-861.78 -273.71,-802.69 -273.71,-524.12 -329.12,-468.71 -340.25,-468.71 -355.24,-453.72 -355.24,-433.48 -373.33,-415.4 -373.33,-311.88 -337.67,-276.23 -337.67,-130.59 -297.64,-90.55 S1.3 -238.02,-31.5 -95.45,-174.07 -87.85,-174.07 S1.1 -78.96,-165.53 R10.1
  Bottom Layer w11.81: v1(-279.91,-950.78) -279.91,-953.79 -251.12,-925 v1(-155,-925)
REDLED: R26.1 U3.59 | length 673.3
  Top Layer w11.81: v1(-730,-635) v1@-730,-632.58 ; v1@-722.96,-639.62 -722.96,-642.56 U3.59 ; v1(-438.51,-299.6) R26.1@-438.51,-260.79
  Bottom Layer w11.81: v1@-732.17,-635 -732.17,-401.61 -709.42,-378.86 -676.25,-378.86 -637.04,-339.65 -633.81,-342.89 -612.61,-342.89 -603.59,-333.87 -590.07,-333.87 -570.6,-314.41 -515.7,-314.41 -515.48,-314.62 -494.28,-314.62 -479.26,-299.6 v1(-438.51,-299.6)
SPCK: U3.21 | length 227.1
  Top Layer w11.81: v2@-1295,-557.52 -1295,-580 -1278.27,-596.73 -1233.9,-596.73 -1208.06,-622.56 U3.21
  other v2: -1291.34,-557.52
"SS RX": P3.3 U3.29 | length 379.6
  Top Layer w11.81: v1(-1315,-775) -1315,-774.3 -1308.31,-767.61 -1188.53,-767.61 -1175.58,-780.56 U3.29
  Top Layer w13.78: P3.3@-1415.09,-845.56 v1@-1317.87,-845.56
  Bottom Layer w11.81: v1(-1315,-775) -1315,-838.89 v1@-1313.1,-840.79
  other v1: -1314.59,-842.28
"SS TX": P3.4 U3.30 | length 320.6
  Top Layer w11.81: P3.4@-1411.09,-799.56 -1326.63,-799.56 -1325.6,-800.59 -1304.4,-800.59 -1303.37,-799.56 -1299.67,-799.56 -1286.42,-786.31 -1194.89,-786.31 -1181.63,-799.56 U3.30
  Top Layer w13.78: P3.4@-1415.09,-795.56 P3.4@-1411.09,-799.56
STAT: P3.2 U3.44 | length 735.8
  Top Layer w11.81: P3.2 -1315.02,-898.55 v1(-1312.81,-900.76) ; v1(-828.78,-861.22) -828.64,-861.22 -827.42,-860 -818,-869.42 U3.44
  Bottom Layer w11.81: v1(-1312.81,-900.76) -1281,-932.57 -1228.5,-932.57 -1177.22,-983.84 -1164.41,-983.84 -1132.21,-951.64 -1132.21,-950.55 -1115.13,-933.47 -1092.41,-933.47 -1040.57,-881.63 -1002.96,-881.63 -1002.82,-881.76 -981.62,-881.76 -981.49,-881.63 -882.72,-881.63 -861.09,-860 -830,-860 v1(-828.78,-861.22)
"USD CD": R13.1 SD1.CD U3.57 | length 1016
  Top Layer w11.81: v1(-715,-705) -715.29,-705 -720.14,-700.16 -701.54,-681.56 U3.57 ; v1(-329.65,-443.12) -242.24,-530.53 -242.24,-539.02 -122.44,-539.02 R13.1
  Bottom Layer w11.81: SD1.CD@-600.62,-691.61 -701.61,-691.61 v1(-715,-705) -717.12,-707.12 -717.12,-688.53 -686.69,-658.1 -686.69,-586.69 -600.62,-500.62 SD1.CD@-600.62,-467.2 ; SD1.CD@-596.76,-443.12 v1(-329.65,-443.12)
"USD CLK": R17.1 SD1.5 U3.41 | length 1126.9
  Top Layer w11.81: U3.41 -879.69,-909.87 -879.69,-878.67 -886.61,-871.75 -886.61,-857.8 -849.4,-820.59 -836.58,-807.77 -754.42,-807.77 -699.78,-862.42 -496.51,-862.42 -418.31,-784.21 -418.31,-783.18 -417.49,-782.36 v1(-417.49,-752.28) ; v1(-146.82,-567.16) -140.35,-573.64 -122.38,-573.64 R17.1
  Bottom Layer w11.81: v1(-417.49,-752.28) -417.49,-766.35 -402.3,-781.54 -346.48,-781.54 -276.65,-711.71 -276.65,-600.81 -239.3,-563.46 SD1.5@-195.11,-563.46 ; SD1.5 -193.18,-567.16 v1(-146.82,-567.16)
"USD CMD": R16.1 SD1.3 U3.38 | length 1214
  Top Layer w11.81: U3.38 -936,-856.66 -943.83,-848.83 -943.83,-770.39 -884.61,-770.39 v1(-860,-795) ; v1(-701.46,-913.84) -571.3,-913.84 -555.31,-897.85 -478.07,-897.85 -423.42,-843.2 -400.03,-843.2 -367.9,-811.07 -375,-803.98 v1(-375,-810) ; v1(-195.74,-649.4) -187.01,-658.12 -125.84,-658.12 -114.03,-646.32 R16.1
  Bottom Layer w11.81: v1(-860,-795) -823.81,-795 -759.42,-859.38 -759.42,-877.31 -722.88,-913.84 v1(-701.46,-913.84) ; v1(-375,-810) -364.26,-799.26 -339.14,-799.26 -258.93,-719.05 -258.93,-677.23 -231.1,-649.4 v1(-195.74,-649.4)
"USD DAT0": R18.1 SD1.7 U3.42 | length 1140.3
  Top Layer w11.81: U3.42@-856.87,-912.56 -856.87,-881.5 -861.98,-876.39 -861.98,-858.22 -842.06,-838.31 -829.24,-825.49 -761.76,-825.49 -707.12,-880.14 -485.41,-880.14 -430.76,-825.48 -414.83,-825.48 -400.59,-811.24 -400.59,-790.51 -380.6,-770.53 v1(-380.6,-754.63) ; v1(-163.08,-478.22) -122.76,-478.22 -110.97,-490 R18.1
  Bottom Layer w11.81: v1(-380.6,-754.63) -352.81,-754.63 -301.48,-703.29 -301.48,-529.12 -250.58,-478.22 v1(-163.08,-478.22)
"USD DAT1": R19.1 SD1.8 U3.52 | length 852.6
  Top Layer w11.81: U3.52 -445.32,-780.56 -445.32,-734.44 -423.42,-712.54 v1(-381.25,-712.54) ; v1(-157.09,-425.59) -109.19,-425.59 -108.7,-425.1 R19.1
  Bottom Layer w11.81: v1(-381.25,-712.54) -350.7,-712.54 -319.19,-681.03 -319.19,-476.71 -268.08,-425.59 v1(-157.09,-425.59)
"USD DAT2": R14.1 SD1.1 U3.26 | length 1296.6
  Top Layer w11.81: U3.26 v1@-991.56,-721.56 ; v1(-927.44,-724.48) -926.3,-725.62 -831.86,-725.62 -798.3,-759.18 v1@-756.42,-759.18 ; v1(-505.56,-956.61) -486.72,-956.61 -423.93,-893.82 -349.16,-893.82 v1@-329.74,-913.23 ; v1(-173.95,-774.16) -173.95,-758.46 -156.75,-741.26 R14.1
  Bottom Layer w11.81: v1(-990,-720) -985.24,-724.77 -980.47,-720 -975.99,-724.48 v1(-927.44,-724.48) ; v1@-745,-758.75 -743.92,-759.83 -708.49,-759.83 -692.73,-775.59 -561.2,-775.59 -552.23,-784.56 -552.23,-883.34 -505.56,-930.01 v1(-505.56,-956.61) ; v1(-322.84,-906.33) -305.37,-906.33 -174.64,-775.6 SD1.1@-174.64,-742.2
  other v1: -745,-760
"USD DAT3": R15.1 SD1.2 U3.37 | length 1216.6
  Top Layer w11.81: U3.37 -956,-861.71 -961.54,-856.17 -961.54,-758.71 -955.5,-752.67 -848.43,-752.67 v1(-833.31,-767.79) ; v1(-549.24,-929.25) -484.42,-929.25 -416.08,-860.91 v1(-374.2,-860.91) ; v1(-229.68,-698.7) -204.91,-698.7 -182.63,-676.42 -181.13,-676.42 -180.94,-676.23 -179.89,-676.23 -179.66,-676 R15.1@-115.53,-676
  Bottom Layer w11.81: v1@-830,-763.75 -751.96,-841.79 -623.22,-841.79 -577,-888 -577,-926.23 -573.97,-929.25 v1(-549.24,-929.25) ; v1(-374.2,-860.91) -366.61,-860.91 -241.22,-735.52 -241.22,-705.48 SD1.2@-234.21,-698.47
VCC: BLE1.17 BLE1.19 BLE2.17 BLE2.19 BLE3.17 BLE3.19 C9.1 C18.1 C19.1 C20.1 C21.1 C22.1 C30.1 D2.4 ICSP1.1 ICSP2.1 ICSP3.1 ICSP4.1 R10.2 R11.2 R12.2 R13.2 R14.2 R15.2 R16.2 R17.2 R18.2 R19.2 SD1.4 U3.7 U6.1 | length 5804.5
  Top Layer w11.81: -1199.08,-282.82 -1149.5,-233.24 -970.51,-233.24 ; -966.95,-236.8 -954.41,-249.34 -865.81,-249.34 -808.56,-306.59 -808.56,-371.95 ; U3.7 -857,-411.5 C9.1@-851.3,-405.8 ; C9.1@-849.14,-401.21 -837.81,-401.21 -808.56,-371.95 ; D2.4 -504.61,-76.97 -532.24,-104.59 -532.24,-238.41 -549.18,-255.36 ; v1(-405,-365) -423.73,-365 -483.71,-305.01 -495.66,-305.01 -496.36,-305.7 -524.03,-305.7 -549.18,-280.56 -549.18,-255.36 ; v1(-343.47,-376.98) -273.2,-376.98 -126.01,-229.79 R10.2 ; -808.56,-371.95 -804.92,-375.59 -705.91,-375.59 -673.07,-342.75 -673.07,-239.61 -666.18,-232.72 R11.2 -615.21,-244.63 -602.42,-244.63 -602.42,-248.44 -595.5,-255.36 -549.18,-255.36
  Top Layer w13.78: U6.1@-1352.94,-289.73 -1305.16,-289.73 -1298.25,-282.82 -1236.92,-282.82 ; R12.2 -1271.32,-114.6 -1218.9,-167.03 -1218.9,-170.12 -1199.08,-189.93 -1199.08,-282.82 -1236.92,-282.82 ; v3(-1291.26,-320.82) -1284.16,-313.73 C30.1 -1236.92,-312.35 -1236.92,-282.82 ; BLE2.17@-1125.03,-1171.17 -1125.03,-1118.73 v1(-1114.29,-1108) -1063.8,-1108 -1035.9,-1135.9 C21.1@-1035.9,-1148.68 ; BLE2.17 -1122.79,-1202.37 -1144.7,-1224.28 -1144.7,-1266.23 -1136.82,-1274.12 BLE2.19@-1111.35,-1274.12 ; v1(-657.13,-1309.58) -657.13,-1285.69 -637.68,-1266.23 -629.8,-1274.12 BLE3.19@-600.77,-1274.12 ; -637.68,-1262.67 -637.68,-1227.84 -612.21,-1202.37 BLE3.17 ; BLE3.17@-611.12,-1170.14 -611.12,-1117.7 v1(-600.39,-1106.96) -551.73,-1106.96 C22.1@-550.97,-1106.2 ; v1(-219.13,-613.85) -171.5,-613.85 -166.55,-618.79 -75.57,-618.79 ; R10.2@-114.39,-234.11 -75.13,-273.36 -75.13,-935.13 -39.04,-971.22 C20.1@-39.04,-1112.14 ; BLE1.19@-90.14,-1274.06 -115.6,-1274.06 -123.49,-1266.18 -123.49,-1224.23 -101.57,-1202.32 BLE1.17 -101.57,-1123.2 v1(-90.84,-1112.47) -42.18,-1112.47 C20.1
  Bottom Layer w11.81: v1(-960.88,-218.09) -960.88,-262.24 ICSP4.1@-951.52,-271.59 ; v1(-405,-365) -357.4,-365 v1@-343.47,-378.93
  Bottom Layer w13.78: ICSP2.1 -1126.42,-1108 v1(-1114.29,-1108) -1051.82,-1108 -881.59,-1278.23 -780.5,-1278.23 -661.61,-1159.34 -661.61,-1103.93 ICSP3.1 -612.51,-1106.96 v1(-600.39,-1106.96) ; v1(-657.13,-1309.58) -271.4,-1309.58 -269.33,-1311.64 -90.84,-1133.15 v1(-90.84,-1112.47) -102.96,-1112.47 ICSP1.1
"VOUT SUIT": C29.1 P3.12 U6.5 U6.8 | length 244.3
  Top Layer w11.81: -1490.19,-291.15 -1462.63,-291.15 C29.1@-1462.63,-336.35 ; -1490.19,-217.04 -1486.11,-212.96 U6.5@-1461.21,-212.96 ; C29.1 -1454.04,-356.62 P3.12@-1415.09,-395.56
  Top Layer w15.75: -1490.19,-291.15 -1490.19,-217.04
XIN12: C34.1 U3.62 X2.2 | length 209.3
  Top Layer w11.81: U3.62 -620.77,-583.56 C34.1@-591.43,-554.23
  Top Layer w13.78: C34.1@-591.43,-554.23 -477.1,-554.23 X2.2
XIN32: C32.1 U3.32 X1.2 | length 187.1
  Top Layer w13.78: X1.2 -1241.47,-903.71 -1241.19,-903.43 C32.1 ; -1168.66,-899.2 -1153.09,-883.64 -1153.09,-872.84 -1119.82,-839.56 U3.32
XOUT12: C33.1 U3.61 X2.1 | length 289
  Top Layer w11.81: U3.61 C33.1@-538.54,-602.56
  Top Layer w13.78: C33.1@-538.54,-602.56 -536.45,-600.47 -530.92,-594.95 -430.26,-594.95 -407.81,-617.4 X2.1
XOUT32: C31.1 U3.31 X1.1 | length 189.2
  Top Layer w11.81: C31.1 -1169.03,-862.33 -1151.49,-844.79 -1151.49,-822.28 -1148.77,-819.56 U3.31
  Top Layer w13.78: X1.1 -1241.47,-869.44 C31.1@-1190.03,-869.44
pads on no net: BLE1.12 BLE1.13 BLE1.14 BLE1.20 BLE1.21 BLE2.12 BLE2.13 BLE2.14 BLE2.20 BLE2.21 BLE3.12 BLE3.13 BLE3.14 BLE3.20 BLE3.21 F2.1 F3.1 F4.1 F6.1 F7.1 ICSP1.0 ICSP1.7 ICSP2.0 ICSP2.7 ICSP3.0 ICSP3.7 ICSP4.0 ICSP4.7 S1.0 S2.0 S3.0 U3.1 U3.40 U3.55 U6.2 U6.3 U6.6 U6.7

## Polygon pours and split planes (outlines as drawn)
GND on Bottom Layer "Bottom Layer-No Net" (solid, remove dead copper, pour order 7): -1500,-1574.85 -1495.85,-1570.7 -0.74,-1570.7 0,-1569.96 0,0 -1500,0
GND on Bottom Layer "Bottom Layer-No Net" (solid, pour order 8): -649.19,-545.01 -649.19,-698.65 -350.86,-698.65 -350.97,-545.16
GND on Bottom Layer "Bottom Layer" (solid, pour order 5): -1292.51,-992.7 -1292.51,-796.55 -1148.94,-796.55 -1148.94,-973.57 -1148.94,-992.7 -1172.48,-992.7
GND on Top Layer "Bottom Layer-No Net" (solid, remove dead copper, pour order 6): -1500,-1574.85 -1495.85,-1570.7 -0.74,-1570.7 0,-1569.96 0,0 -1500,0

## Other copper
Bottom Layer:
  pour cut-out: -0.74,-1570.7 -4.88,-1574.85 -1500,-1574.85 -1500,-1631.88 -1500,-1687.5 -1489.78,-1697.72 -38.58,-1697.72 -0.74,-1687.5
  pour cut-out: -62.26,-1687.5 -416.49,-1687.5 -416.54,-1687.45
  pour cut-out: -954.47,-264.74 -754.47,-264.74 -754.47,-314.74 -954.47,-314.74
  pour cut-out: -1352.48,-1031.93 -1152.48,-1031.93 -1152.48,-1081.93 -1352.48,-1081.93
  pour cut-out: -838.58,-1030.9 -638.58,-1030.9 -638.58,-1080.9 -838.58,-1080.9
  pour cut-out: -329.03,-1036.4 -129.03,-1036.4 -129.03,-1086.4 -329.03,-1086.4

## Silkscreen, mask and mechanical layers (free items; w line width, h text height)
Top Overlay:
  drawing of 779 lines, arcs and shapes, not listed
  text "Version v.01.11" at -46.76,-19.85 h59.06 r270
  text "Copyright©Heddoko™ 2015" at -303.24,-281.4 h59.06 r270
  text "VCC" at -1260.97,-361.84 h19.68
  text "+" at -846.84,-411.91 h59.06 r90
  text "GND" at -1255.96,-412.66 h19.68
  text "CS" at -1267.75,-508.07 h19.68
  text "SPCK" at -1262.13,-569.23 h19.68
  text "MOSI" at -1260.45,-644.43 h19.68
  text "MISO" at -1259.89,-728.61 h19.68
  text "SCL" at -1031.82,-1050.97 h19.68
  text "SDA" at -1040.48,-1095.62 h19.68
Bottom Overlay:
  drawing of 841 lines, arcs and shapes, not listed
  text "Copyright © Heddoko™ 2015" at -1438.92,-210.84 h59.06 r90
  text "Version v.01.11" at -1378.33,-214.03 h59.06 r90
  text "Serial Number" at 0,-218.74 h59.06
  text "No Reproduction or reverse engineering permitted" at -315.24,-1286.76 h59.06
Mechanical 27:
  lines w6.3: -1083.42,-1687.5 -927.17,-1687.5 -927.17,-1577.5 -572.84,-1577.5 -572.79,-1577.55 -572.79,-1687.45 ; -1083.42,-1687.5 -1083.42,-1687.5 ; -1083.42,-1687.5 -1083.42,-1577.5 -1437.75,-1577.5 -1437.75,-1687.5 -1500,-1687.5 -1500,0 0,0 0,-1687.5 -62.26,-1687.5 -62.26,-1577.5 -416.58,-1577.5 -416.54,-1577.55 -416.54,-1687.45 -572.79,-1687.45 ; -572.79,-1687.45 -572.84,-1687.5 -572.79,-1687.45

## Text inside footprints (layer, text, board x,y; h text height)
U3: Top Overlay "*" at -757.41,-423.19 h77.5 r270; Mechanical 16 "*" at -740,-458.56 h77.5 r270